# Altium PCB SM_ME0005V2.6_20161210.PcbDoc (part 2 of 2)
Units mm, origin at the board's own origin, x right, y up, seen from the top; angles counter-clockwise.
Board outline 58.04 x 88.14 mm, 2 copper layers (Top Layer, Bottom Layer); 87 components, 70 nets, 269 pads, 297 vias.
Unrouted connection lines stored in the file: 30.
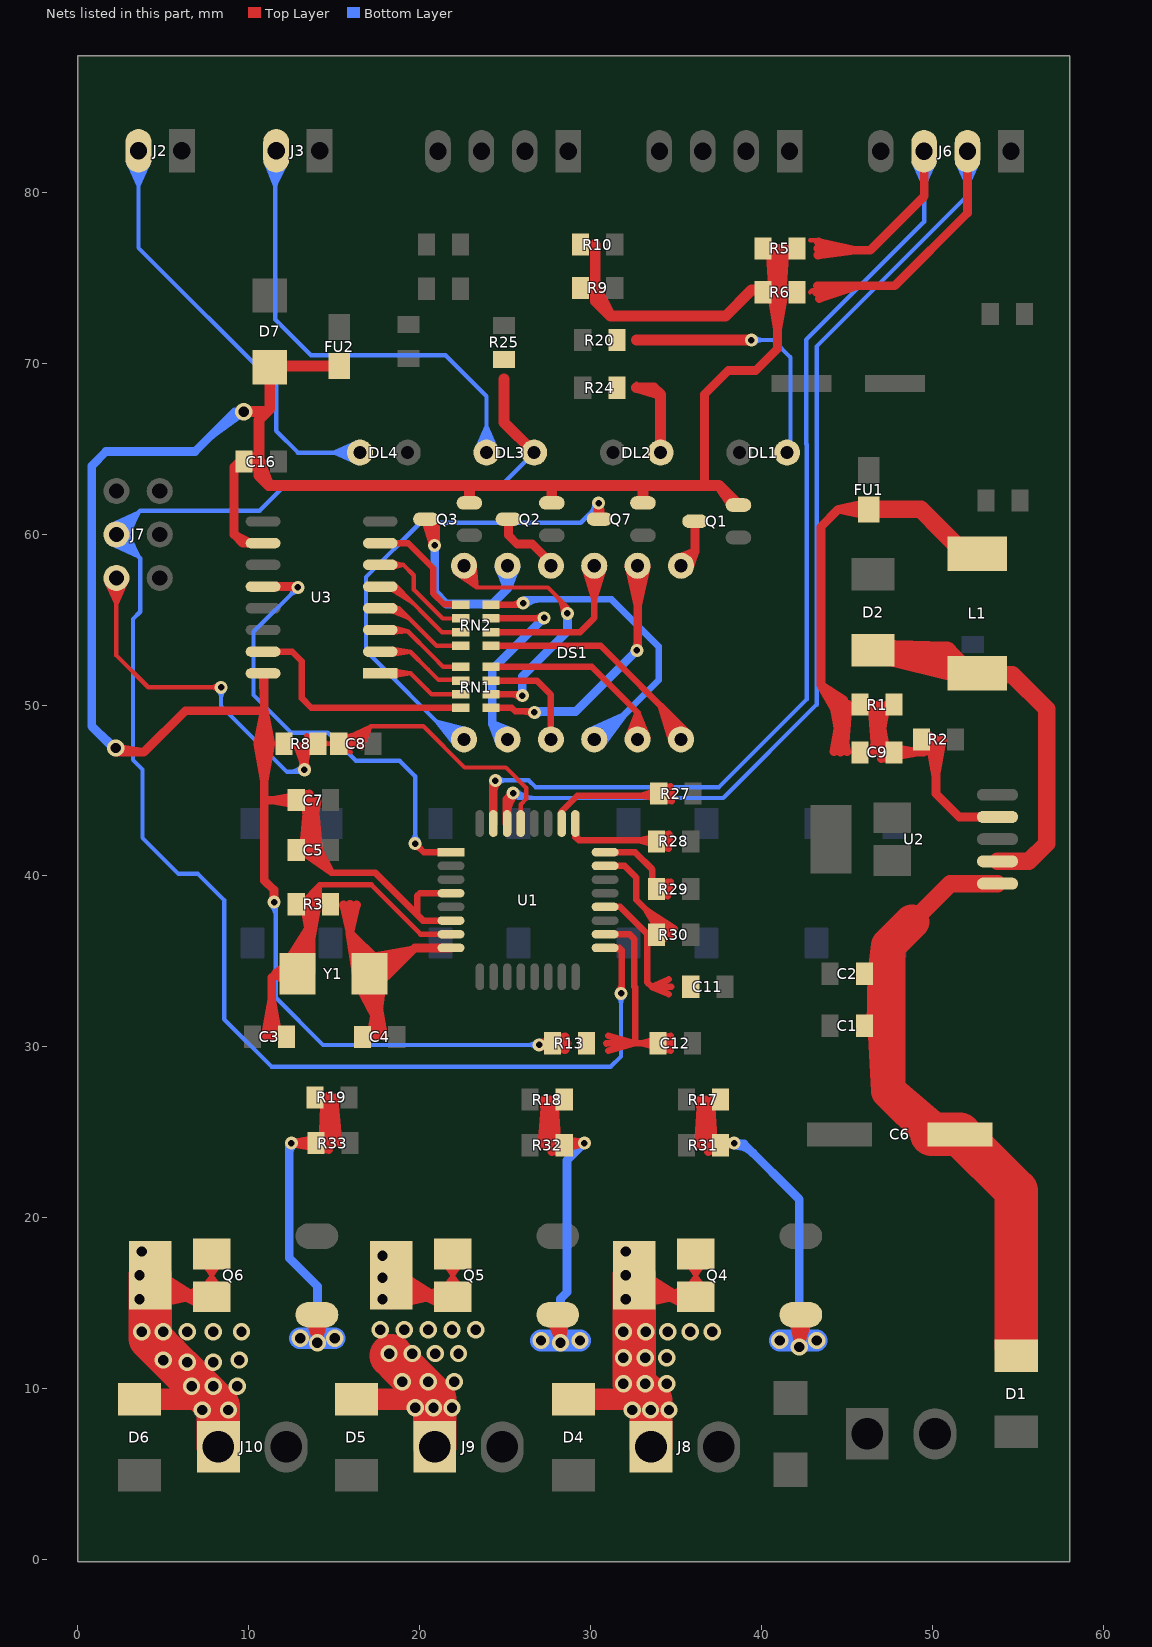
[diagram p2: the nets of this part, all layers, seen from the top]

## Via types
v1: diameter 1.016, hole 0.61, Top Layer to Bottom Layer, 247 vias
v2: diameter 0.762, hole 0.381, Top Layer to Bottom Layer, 50 vias

## Nets (pads, with @x,y where several pads share a name; then routed paths per layer and width w, separated by ;. In a path a pad name is that pad's centre, name@x,y a point inside that pad or via, vN(x,y) a via of type N, cw(c..) or ccw(c..) an arc to the next point about the centre after c; other vN are vias at no path point) (continued)
NetC1_1: C1.1 C2.1 C6.1 D1.K U2.1 | length 59.8
  Top Layer w1.016: 48.812,37.327 51.038,39.553 ; U2.1@52.955,39.553 51.038,39.553 ; U2.1@53.812,39.553 51.038,39.553
  Top Layer w2.032: 47.161,31.231 47.224,34.279 ; 48.812,37.327 47.415,35.93 ; C6.1@49.955,24.881 47.415,27.421 ; C6.1@50.406,24.881 47.415,27.421 ; 47.224,34.279 47.415,35.93 ; 47.224,34.279 47.415,35.93 ; 47.224,34.279 47.415,30.723 ; 47.415,27.421 47.415,30.723 ; 47.415,27.421 47.224,31.231 47.415,35.93 ; 47.415,30.723 47.415,35.93
  Top Layer w2.54: C6.1@49.955,24.881 C6.1@51.606,24.881 54.908,21.579 D1.K@54.908,12.435
NetC3_2: C3.2 R3.2 U1.7 Y1.2 | length 77.9
  Top Layer w0.254: 13.633,38.343 13.633,38.978
  Top Layer w0.305: 13.29,38.603 14.141,39.486 ; 13.536,38.419 14.141,39.486 ; 13.633,38.978 14.141,39.486 ; 13.696,38.343 14.141,39.486 ; 13.866,38.291 14.141,39.486 ; 14.172,38.26 14.141,39.486 ; 20.129,36.591 U1.7@21.294,36.591 ; U1.7@21.831,36.591 20.057,36.591 17.162,39.486 14.141,39.486
  Top Layer w0.508: 10.967,30.63 11.347,32.755 C3.2@11.727,30.63 ; 11.347,30.596 11.347,34.076 ; Y1.2@12.128,34.756 13.633,37.123 ; Y1.2@12.582,34.523 13.633,37.123 ; Y1.2@12.611,33.521 11.55,34.279 ; Y1.2@12.611,35.037 11.55,34.279 ; Y1.2@12.822,33.993 11.55,34.279 ; Y1.2@12.822,34.565 11.55,34.279 ; Y1.2@12.854,34.279 11.55,34.279 ; Y1.2@13.134,34.363 13.633,37.123 ; R3.2@13.253,38.309 13.633,36.184 14.013,38.309 ; 13.633,38.343 13.633,35.549 ; Y1.2@13.642,34.319 13.633,37.123 ; 11.55,34.279 Y1.2@12.363,34.279 ; Y1.2@12.361,35.054 13.633,35.549 ; Y1.2@12.361,35.054 13.633,35.549 ; Y1.2@12.361,35.054 13.633,35.549 ; Y1.2@12.363,34.279 13.633,35.549 ; Y1.2@12.363,34.279 12.608,34.524 13.633,35.549 ; Y1.2@12.636,34.617 13.633,35.549 ; Y1.2@12.636,34.617 13.633,35.549 ; Y1.2@12.636,34.617 13.633,35.549 ; Y1.2@12.854,34.429 13.633,35.549 ; Y1.2@12.854,34.429 13.633,37.123 ; Y1.2@12.854,34.429 13.633,35.549 ; Y1.2@12.854,34.429 13.633,35.549 ; Y1.2@13.106,34.29 13.633,35.549 ; Y1.2@13.106,34.29 13.633,35.549 ; Y1.2@13.106,34.29 13.633,35.549 ; Y1.2@13.611,34.185 13.633,35.549 ; Y1.2@13.611,34.185 13.633,35.549 ; Y1.2@13.611,34.185 13.633,35.549
NetC4_2: C4.2 R3.1 U1.8 Y1.1 | length 74.3
  Top Layer w0.508: 15.54,38.3 15.919,36.667 ; 15.919,38.343 15.919,36.667 ; Y1.1@16.296,34.186 15.919,36.667 ; 16.298,38.3 15.919,36.667 ; Y1.1@16.3,33.874 17.513,31.531 ; Y1.1@16.773,34.063 17.513,31.531 ; Y1.1@16.79,34.314 15.919,36.667 ; Y1.1@16.808,35.186 19.601,35.675 ; Y1.1@16.941,34.694 19.601,35.675 ; Y1.1@17.054,34.129 17.513,31.531 ; C4.2@17.133,30.617 17.513,32.743 17.893,30.617 ; Y1.1@17.193,34.177 19.601,35.675 ; Y1.1@17.303,34.574 15.919,36.667 ; Y1.1@17.34,34.164 17.513,31.531 ; Y1.1@17.5,33.77 19.601,35.675 ; 17.513,30.584 Y1.1@17.513,35.073 ; Y1.1@17.698,34.897 15.919,36.667 ; Y1.1@17.85,34.148 17.513,31.531 ; U1.8@21.294,35.791 19.717,35.791 ; U1.8@21.831,35.791 19.717,35.791 ; 15.919,36.667 Y1.1@17.513,35.073 ; 15.919,36.667 17.054,34.429 19.601,35.675 ; Y1.1@17.513,35.073 17.513,34.279 17.513,34.209 18.135,34.209 ; 18.135,34.209 19.717,35.791 ; 18.135,34.209 17.393,34.999 18.135,34.209 ; 18.135,34.209 17.298,33.521 18.135,34.209 ; 18.135,34.209 17.11,34.561 18.135,34.209 ; 18.135,34.209 17.074,33.992 18.135,34.209 ; 18.135,34.209 Y1.1@17.054,34.279 18.135,34.209
NetC9_1: C9.1 FU1.1 L1.2 R1.1 | length 55.5
  Top Layer w0.508: 44.241,47.267 44.621,49.392 45.001,47.267 ; 44.241,49.993 44.621,47.868 ; 44.251,49.801 43.478,51.17 ; 44.31,49.957 44.904,47.806 ; 44.557,50.027 43.478,51.17 ; 44.621,47.233 44.621,50.027 ; 44.684,50.027 44.904,47.806 ; 44.801,50.32 43.478,51.17 ; 45.001,49.993 44.621,47.868 ; 45.065,50.032 44.904,47.806 ; FU1.1@46.231,61.078 44.494,61.457 ; FU1.1@46.231,61.836 44.494,61.457 ; 43.478,51.17 43.478,60.441 44.494,61.457 ; 43.478,51.17 44.621,50.027 ; 44.494,61.457 FU1.1@46.272,61.457 44.494,61.457 ; 44.621,47.868 44.621,50.027
  Top Layer w1.016: FU1.1@46.272,61.457 49.32,61.457 ; L1.2@51.872,58.861 49.32,61.457 ; L1.2@52.622,58.861 51.916,58.861 49.32,61.457
NetC9_2: C9.2 R1.2 R2.2 U2.4 | length 51.8
  Top Layer w0.508: 46.463,50.032 46.624,47.806 ; 46.527,47.267 46.907,49.392 C9.2@47.287,47.267 ; 46.527,49.993 46.907,47.868 ; 46.843,50.027 46.624,47.806 ; 46.97,47.233 49.129,47.233 ; 47.004,46.853 49.129,47.233 ; 47.004,47.612 49.129,47.233 ; 47.218,49.957 46.624,47.806 ; R1.2@47.287,49.993 46.907,47.868 ; R2.2@49.829,47.961 50.209,45.836 ; 50.589,47.961 50.209,45.836 ; U2.4@52.955,43.453 51.576,43.453 ; U2.4@53.812,43.453 51.576,43.453 ; 46.907,47.868 46.907,50.027 46.907,47.233 49.447,47.233 ; 49.447,47.233 50.209,47.995 ; 49.447,47.233 50.374,47.69 49.447,47.233 ; 49.447,47.233 49.822,48.196 49.447,47.233 ; 49.447,47.233 50.145,47.995 49.447,47.233 ; 50.209,45.836 50.209,47.995 ; 50.209,47.995 50.209,44.82 51.576,43.453
NetC11_1: C11.1 U1.20 | length 11.4
  Top Layer w0.381: U1.20@30.848,38.191 31.737,38.191 ; 34.56,33.082 33.572,33.517 ; 34.56,33.952 33.572,33.517 ; 34.651,33.517 33.572,33.517 ; 34.715,33.517 33.572,33.517 ; 31.737,38.191 33.318,36.61 33.318,33.771 33.572,33.517 ; 31.737,38.191 31.385,38.191 31.737,38.191
NetC12_2: C12.2 R13.1 U1.18 | length 23
  Top Layer w0.254: 30.905,30.11 30.905,30.215
  Top Layer w0.381: U1.18@30.848,36.591 32.276,36.591 ; 30.905,30.215 32.556,30.215 ; 30.968,30.215 32.556,30.215 ; 31.031,29.775 32.556,30.215 ; 31.031,30.655 32.556,30.215 ; U1.18@31.385,36.591 32.276,36.591 ; 34.689,29.774 32.967,30.215 ; 34.689,30.656 32.967,30.215 ; 34.745,30.215 32.967,30.215 ; 34.808,30.215 32.556,30.215 ; 32.276,36.591 32.556,36.311 32.556,33.528 32.606,33.478 32.606,30.265 32.556,30.215
NetD2_K: D2.K L1.1 U2.2 | length 43.4
  Top Layer w1.016: L1.1@52.114,51.785 54.674,51.785 ; U2.2@53.812,40.853 55.64,40.853 ; U2.2@54.668,40.853 55.64,40.853 ; 54.674,51.785 56.686,49.773 56.686,41.899 55.64,40.853 ; 54.674,51.785 53.372,51.861 54.674,51.785
  Top Layer w1.27: D2.K@46.526,53.075 50.824,53.075 ; D2.K@46.86,53.075 L1.1@51.872,51.861 ; L1.1@51.491,51.953 46.843,53.202 50.824,53.075 ; L1.1@52.114,51.785 50.824,53.075 ; 50.824,53.075 L1.1@51.872,51.861 ; 50.824,53.075 L1.1@51.872,51.861
NetDL1_A: DL1.A R20.1 | length 19.1
  Top Layer w0.635: 32.683,71.363 v2(39.414,71.363) ; 32.746,71.363 35.286,71.363
  Bottom Layer w0.254: v2(39.414,71.363) 40.684,71.363 41.7,70.347 DL1.A@41.7,65.078 ; v2@39.594,71.183 cw(c40.027,70.75) 40.027,71.363 cw(c40.027,71.976) v2@39.594,71.543 ; DL1.A@41.7,65.078 41.397,64.775 41.447,64.825 DL1.A@41.7,65.078
NetDL2_A: DL2.A R24.1 | length 8.5
  Top Layer w0.254: 32.683,68.569 32.683,68.823
  Top Layer w0.635: 32.683,68.569 33.699,68.569 ; DL2.A@34.097,64.775 34.097,68.171 ; 32.746,68.569 34.097,68.171 ; 32.746,68.569 33.699,68.569 ; 32.746,68.569 33.699,68.569 ; 33.699,68.569 34.097,68.171
NetDS1_a: DS1.a RN1.8 | length 21.8
  Top Layer w0.381: RN1.8@24.174,49.837 25.38,49.837 ; RN1.8@24.432,49.837 25.38,49.837 ; 26.1,49.633 cw(c26.1,48.956) v2@26.579,49.435 ; v2(26.714,49.57) 26.65,49.633 25.583,49.633 25.38,49.837
  Top Layer w0.508: DS1.a@32.248,58.099 32.753,55.869 DS1.a@33.258,58.099 ; v2@32.619,53.292 ccw(c32.294,53.616) 32.753,53.616 ; v2@32.753,53.202 DS1.a@32.753,58.155
  Bottom Layer w0.508: v2@26.765,49.621 29.127,49.621 v2(32.708,53.202) ; v2@26.804,49.48 cw(c27.143,49.141) 27.143,49.621
NetDS1_b: DS1.b RN1.6 | length 27.6
  Top Layer w0.254: DS1.b@22.127,57.724 23.336,56.885 ; DS1.b@22.292,57.922 23.336,56.885 ; DS1.b@22.777,57.971 DS1.b@22.593,58.155 ; DS1.b@22.944,58.303 23.336,56.885 ; DS1.b@23.197,58.35 23.336,56.885 ; 27.941,56.445 cw(c26.857,55.361) v2@28.39,55.361 ; 28.375,56.011 cw(c27.725,55.361) v2(28.644,55.361) 28.644,55.742 27.501,56.885 23.336,56.885 ; DS1.b@22.593,58.155 22.593,57.628 23.336,56.885 ; DS1.b@22.593,58.155 23.336,56.885
  Top Layer w0.381: RN1.6@24.174,50.637 25.926,50.637 v2(26.003,50.56) ; RN1.6@24.432,50.637 v2@25.825,50.637 ; 25.358,50.637 cw(c25.358,49.916) 25.868,50.426 ccw(c25.358,49.916) 25.358,50.637
  Bottom Layer w0.508: v2(26.003,50.56) 26.003,51.678 28.644,54.32 v2(28.644,55.361)
NetDS1_c: DS1.c RN1.4 | length 7.9
  Top Layer w0.381: RN1.4@24.174,51.437 26.854,51.437 27.673,50.617 DS1.c@27.673,47.995 ; RN1.4@24.432,51.437 25.825,51.437
NetDS1_com1: DS1.com1 Q1.3 | length 5.3
  Top Layer w0.508: DS1.com1@35.021,58.584 36.112,58.974 ; DS1.com1@35.293,58.155 36.112,58.974 ; DS1.com1@35.722,57.883 36.112,58.974 ; Q1.3@36.112,60.756 36.112,58.974
NetDS1_com2: DS1.com2 Q2.3 | length 4.3
  Top Layer w0.508: Q2.3@25.19,60.883 25.19,59.933 25.698,59.425 26.587,59.425 27.673,58.339 DS1.com2@27.673,58.155
NetDS1_com3: DS1.com3 Q3.3 | length 18.3
  Top Layer w0.508: v2(20.872,59.349) 20.872,60.149
  Top Layer w0.635: 20.872,60.375 v2(20.872,59.349) Q3.3@20.364,60.883 20.872,60.375 ; 20.872,60.375 20.714,60.883 20.872,60.375
  Bottom Layer w0.508: v2(20.872,59.349) 20.872,56.606 21.558,55.92 24.25,55.92 25.133,56.803 ; DS1.com3@24.634,58.06 25.133,56.803 ; DS1.com3@25.632,58.06 25.133,56.803 ; 25.133,56.803 DS1.com3@25.133,58.155 25.133,56.803
NetDS1_com4: DS1.com4 Q7.3 | length 39.8
  Top Layer w0.254: v2@30.473,61.711 v2@30.524,61.66
  Top Layer w0.635: Q7.3@30.473,60.934 30.473,61.711 Q7.3@30.524,60.883
  Bottom Layer w0.254: DS1.com4@22.162,47.529 20.993,49.043 ; DS1.com4@22.354,47.699 20.993,49.043 ; DS1.com4@22.769,48.333 20.993,49.043 ; DS1.com4@22.848,48.577 20.993,49.043 ; 29.975,61.224 ccw(c29.387,61.813) v2@30.219,61.813 ; 30.195,61.443 cw(c30.473,61.165) v2@30.473,61.559 ; v2@30.473,61.711 30.462,61.711 29.421,60.67 20.034,60.67 16.859,57.495 16.859,53.177 22.04,47.995 DS1.com4@22.593,47.995 20.993,49.043
  other v2: 30.473,61.813
NetDS1_d: DS1.d RN1.2 | length 15.8
  Top Layer w0.381: RN1.2@24.174,52.237 30.067,52.237 32.753,49.551 ; RN1.2@24.432,52.237 25.825,52.237 ; DS1.d@32.191,48.1 32.753,49.551 ; DS1.d@32.753,47.995 32.753,49.551 ; DS1.d@33.315,48.1 32.753,49.551
NetDS1_dp: DS1.dp RN2.2 | length 28.7
  Top Layer w0.381: RN2.2@24.174,55.869 25.952,55.869 v2(26.054,55.971) ; RN2.2@24.432,55.869 v2@25.825,55.869 ; 25.348,55.869 ccw(c25.348,56.676) 25.919,56.105 cw(c25.348,56.676) 25.348,55.869
  Bottom Layer w0.254: DS1.dp@30.213,47.995 DS1.dp@30.213,48.306
  Bottom Layer w0.381: v2@26.104,56.123 26.168,56.186 31.222,56.186 33.978,53.431 33.978,51.449 30.835,48.306 30.524,48.306 DS1.dp@30.213,47.995 31.935,49.406 ; v2@26.188,55.836 cw(c27.035,54.989) 27.035,56.186 ; DS1.dp@29.911,48.48 31.935,49.406 ; DS1.dp@30.629,47.603 31.935,49.406
NetDS1_e: DS1.e RN2.8 | length 26
  Top Layer w0.381: RN2.8@24.174,53.469 30.587,53.469 35.293,48.763 ; RN2.8@24.432,53.469 25.825,53.469 ; DS1.e@34.772,47.76 34.087,49.969 ; DS1.e@35.74,48.351 34.087,49.969 ; 34.087,49.969 DS1.e@35.293,47.995 ; DS1.e@35.293,47.995 35.293,48.763 ; DS1.e@35.293,47.995 35.293,48.763 ; 35.293,48.763 34.763,48.208 35.293,48.763 ; 35.293,48.763 35.823,48.208 35.293,48.763
NetDS1_f: DS1.f RN2.6 | length 14.6
  Top Layer w0.381: RN2.6@24.174,54.269 29.381,54.269 30.213,55.101 DS1.f@30.213,58.155 ; RN2.6@24.432,54.269 25.825,54.269 ; DS1.f@29.648,58.069 30.213,56.25 DS1.f@30.778,58.069
NetDS1_g: DS1.g RN2.4 | length 15.9
  Top Layer w0.381: RN2.4@24.174,55.069 v2@27.006,55.069 ; RN2.4@24.432,55.069 25.825,55.069 ; 26.721,55.069 ccw(c26.721,55.659) v2@27.138,55.242
  Bottom Layer w0.508: DS1.g@24.708,47.716 24.25,48.878 ; DS1.g@25.133,47.995 24.25,48.878 ; DS1.g@25.412,48.42 24.25,48.878 ; v2(27.273,55.107) 24.25,52.084 24.25,48.878
NetQ4_1: Q4.1 R17.2 R31.2 | length 58.1
  Top Layer w0.508: 36.303,24.239 36.452,26.408 ; 36.367,24.28 36.747,26.405 ; 36.367,26.879 36.747,24.754 R17.2@37.127,26.879 ; 36.437,24.32 37.042,26.408 ; 36.683,24.246 36.452,26.408 ; 36.747,24.246 36.747,26.405 ; 36.747,26.913 36.747,24.373 v2(38.398,24.373) ; 36.826,24.627 v2(38.398,24.373) ; 36.886,23.873 v2(38.398,24.373) ; 37.057,24.32 36.452,26.408 ; R31.2@37.127,24.28 36.747,26.405 ; R31.2@37.191,24.239 37.042,26.408 ; Q4.1@41.811,14.286 v1(42.208,12.435) ; Q4.1@42.793,14.236 v1(42.208,12.435) ; 37.042,26.408 36.81,24.246 v2(38.398,24.373) ; v1(42.208,12.435) 42.208,14.325 42.235,14.352 42.279,14.352 Q4.1@42.305,14.326 v1(42.208,12.435)
  Bottom Layer w0.508: v2@38.398,24.246 cw(c38.398,22.682) 39.504,23.788 ; v2(38.398,24.373) 38.455,24.316 38.976,24.316 42.208,21.084 42.208,12.816 v1(42.208,12.435) ; v2@38.488,24.463 ccw(c38.842,24.817) 38.842,24.316
  Bottom Layer w1.27: v1(41.065,12.816) 42.208,12.816 v1(43.224,12.816)
NetQ5_1: Q5.1 R18.2 R32.2 | length 65.6
  Top Layer w0.254: Q5.1@28.079,14.326 Q5.1@28.081,14.326
  Top Layer w0.508: 27.159,24.239 27.308,26.408 ; 27.223,24.28 27.603,26.405 ; 27.223,26.879 27.603,24.754 R18.2@27.983,26.879 ; 27.293,24.32 27.898,26.408 ; 27.539,24.246 27.308,26.408 ; Q5.1@27.6,14.205 v1(28.238,12.689) ; 27.603,24.246 27.603,26.405 ; 27.603,26.913 27.603,24.373 ; 27.913,24.32 27.308,26.408 ; R32.2@27.983,24.28 27.603,26.405 ; R32.2@28.047,24.239 27.898,26.408 ; Q5.1@28.576,14.298 v1(28.238,12.689) ; 27.603,24.373 v2(29.635,24.373) ; 27.603,24.373 v2(29.635,24.373) ; 27.666,24.246 27.898,26.408 ; 27.666,24.246 v2(29.635,24.373) ; 27.666,24.246 v2(29.635,24.373) ; v1(28.238,12.689) 28.238,14.169 Q5.1@28.081,14.326 v1(28.238,12.689) ; v2(29.635,24.373) 27.679,24.627 v2(29.635,24.373) ; v2(29.635,24.373) 27.728,23.87 v2(29.635,24.373)
  Bottom Layer w0.508: v1@28.238,12.816 28.238,15.261 28.619,15.642 28.619,23.357 v2(29.635,24.373)
  Bottom Layer w1.27: v1@28.238,12.816 v1(27.095,12.816) v1@28.238,12.816 ; v1@28.238,12.816 v1(29.381,12.816) v1@28.238,12.816
NetQ6_1: Q6.1 R19.2 R33.2 | length 67.4
  Top Layer w0.254: 14.719,24.43 14.776,24.373
  Top Layer w0.508: v2(12.49,24.373) 14.649,24.373 ; Q6.1@13.495,14.242 v1(14.014,12.689) ; R33.2@14.332,24.356 14.427,26.515 ; R19.2@14.339,27.006 14.719,24.881 ; 14.464,24.437 15.019,26.564 ; Q6.1@14.476,14.26 v1(14.014,12.689) ; 14.679,23.993 v2@12.553,24.373 ; 14.679,24.752 v2@12.553,24.373 ; 14.719,24.43 14.719,27.167 ; 14.719,27.04 14.719,24.881 ; 14.839,24.373 15.019,26.564 ; 15.084,24.456 14.427,26.515 ; 15.099,27.006 14.719,24.881 ; 15.22,24.375 15.019,26.564 ; v2@12.553,24.373 14.712,24.373 14.427,26.515 ; v1(14.014,12.689) 14.014,14.296 Q6.1@13.984,14.326 v1(14.014,12.689) ; 14.719,26.534 14.396,24.397 14.719,26.539 ; 14.719,26.534 15.154,24.417 14.719,26.539 ; 14.719,26.534 14.776,24.373 14.719,26.539
  Bottom Layer w0.508: 12.363,23.76 cw(c13.103,23.76) v2@12.58,24.283 ; v2@12.363,24.246 12.363,17.642 14.014,15.991 14.014,12.943 v1(14.014,12.689)
  Bottom Layer w1.27: v1@14.014,12.943 v1(12.998,12.943) v1@14.014,12.943 ; v1@14.014,12.943 v1(15.03,12.943) v1@14.014,12.943
NetR27_2: R27.2 U1.26 | length 13.1
  Top Layer w0.381: U1.26@28.309,43.069 28.309,43.788 29.213,44.693 34.715,44.693 34.842,44.82 ; 34.692,45.256 32.99,44.693 ; 34.755,44.376 32.99,44.693 ; 34.778,44.82 32.99,44.693
NetR28_2: R28.2 U1.25 | length 26
  Top Layer w0.254: U1.25@29.109,43.069 29.109,42.28 ; R28.2@34.334,42.026 29.363,42.026 ; 34.559,41.526 33.254,42.026 ; 34.559,42.526 33.254,42.026 ; 34.628,41.773 33.254,42.026 ; 34.628,42.279 33.254,42.026 ; 34.651,42.026 33.254,42.026 ; 29.109,42.28 29.363,42.026 ; 29.109,42.28 U1.25@29.109,42.531 ; 29.109,42.28 U1.25@29.109,42.531 ; U1.25@29.109,42.531 29.363,42.026
  Top Layer w0.381: 34.581,41.587 32.871,42.085 ; 34.611,42.469 32.871,42.085 ; 34.651,42.026 32.871,42.085 ; 34.715,42.026 34.656,42.085 29.303,42.085 ; 29.303,42.085 29.109,42.28 29.109,42.531 29.303,42.085
NetR29_2: R29.2 U1.24 | length 14.1
  Top Layer w0.381: U1.24@30.848,41.391 32.601,41.391 ; U1.24@31.385,41.391 32.601,41.391 ; 34.443,38.84 R29.2@33.617,39.531 ; 34.684,39.675 R29.2@33.617,39.531 ; 34.715,39.232 R29.2@33.915,39.232 ; 32.601,41.391 33.617,40.375 R29.2@33.617,39.531 ; R29.2@33.617,39.531 R29.2@33.915,39.232 ; R29.2@33.617,39.531 34.651,39.232 ; R29.2@33.915,39.232 34.517,38.808 R29.2@33.915,39.232 ; R29.2@33.915,39.232 34.517,39.656 R29.2@33.915,39.232 ; R29.2@33.915,39.232 34.651,39.232 ; R29.2@33.915,39.232 34.651,39.232
NetR30_2: R30.2@33.858,36.565 U1.23 | length 12.9
  Top Layer w0.381: U1.23@30.848,40.591 31.991,40.591 ; U1.23@31.385,40.591 31.991,40.591 ; R30.2@34.298,36.295 33.272,38.008 ; 34.651,36.565 33.272,38.008 ; 34.715,36.565 32.677,38.603 32.677,39.905 31.991,40.591 ; 34.937,36.906 33.272,38.008
NetRN1_1: RN1.1 U3.3 | length 9.1
  Top Layer w0.254: U3.3@17.691,54.396 17.767,54.32 19.297,54.32 ; U3.3@18.402,54.396 19.297,54.32 ; U3.3@18.405,54.218 19.297,54.32 ; U3.3@18.435,54.571 19.297,54.32 ; RN1.1@22.138,52.237 21.38,52.237 ; RN1.1@22.396,52.237 21.38,52.237 ; 19.297,54.32 20.745,52.872 21.38,52.237
NetRN1_3: RN1.3 U3.2 | length 9.6
  Top Layer w0.254: U3.2@17.691,53.126 19.45,53.126 ; U3.2@18.402,53.126 19.45,53.126 ; U3.2@18.417,52.949 19.45,53.126 ; U3.2@18.417,53.303 19.45,53.126 ; 21.125,51.475 RN1.3@22.138,51.437 ; RN1.3@22.396,51.437 22.358,51.475 21.101,51.475 20.516,52.059 19.45,53.126
NetRN1_5: RN1.5 U3.1 | length 9.4
  Top Layer w0.254: U3.1@17.691,51.856 19.475,51.856 20.44,50.891 20.694,50.637 RN1.5@22.396,50.637 ; U3.1@18.402,51.856 19.469,51.856 ; U3.1@18.417,51.679 19.469,51.856 ; U3.1@18.417,52.033 19.469,51.856 ; 21.126,50.637 RN1.5@22.138,50.637
NetRN1_7: RN1.7 U3.15 | length 16.6
  Top Layer w0.254: 13.658,49.849 13.671,49.837
  Top Layer w0.381: U3.15@10.833,53.126 12.541,53.126 ; U3.15@11.544,53.126 12.541,53.126 ; 13.658,49.849 13.1,50.408 13.1,52.567 12.541,53.126 ; 13.671,49.837 RN1.7@22.396,49.837 ; 20.745,49.837 RN1.7@22.138,49.837
NetRN2_1: RN2.1 U3.7 | length 9
  Top Layer w0.381: U3.7@17.691,59.476 19.323,59.476 ; U3.7@18.402,59.476 19.323,59.476 ; 20.791,56.966 20.791,57.241 ; RN2.1@22.138,55.869 21.431,55.894 ; RN2.1@22.396,55.869 22.371,55.894 21.431,55.894 ; 19.323,59.476 20.791,58.007 20.791,57.241 ; 20.791,57.241 20.791,56.534 21.431,55.894
NetRN2_3: RN2.3 U3.6 | length 9.2
  Top Layer w0.254: U3.6@17.691,58.206 19.043,58.206 ; U3.6@18.402,58.206 19.043,58.206 ; U3.6@18.427,58.03 19.043,58.206 ; U3.6@18.427,58.382 19.043,58.206 ; RN2.3@22.138,55.069 21.342,55.069 ; RN2.3@22.396,55.069 21.342,55.069 ; 19.043,58.206 19.653,57.596 19.653,56.758 21.342,55.069
NetRN2_5: RN2.5 U3.5 | length 11.6
  Top Layer w0.254: U3.5@17.691,56.936 18.637,56.936 21.304,54.269 ; U3.5@18.299,56.791 19.61,55.963 ; U3.5@18.402,56.936 19.61,55.963 ; U3.5@18.521,57.068 19.61,55.963 ; RN2.5@22.138,54.269 21.304,54.269 ; RN2.5@22.675,54.269 21.304,54.269
NetRN2_7: RN2.7 U3.4 | length 12.4
  Top Layer w0.254: U3.4@17.691,55.666 18.789,55.666 ; U3.4@18.322,55.507 19.386,55.069 ; U3.4@18.506,55.81 19.386,55.069 ; 21.126,53.469 RN2.7@22.138,53.469 ; RN2.7@22.396,53.469 20.986,53.469 18.789,55.666 ; U3.4@18.402,55.666 18.789,55.666 ; U3.4@18.402,55.666 19.386,55.069 ; U3.4@18.402,55.666 18.789,55.666 ; 18.789,55.666 18.443,55.839 18.789,55.666 ; 18.789,55.666 18.443,55.493 18.789,55.666
OUT1: D4.A J8.1 Q4.2 | length 114.1
  Top Layer w0.254: D4.A@29,9.387 D4.A@29.857,9.387 ; Q4.2@32.513,15.262 Q4.2@35.383,15.376 ; Q4.2@32.515,15.517 Q4.2@35.383,15.376 ; Q4.2@32.535,15.007 Q4.2@35.383,15.376 ; Q4.2@32.555,15.876 Q4.2@35.383,15.376 ; Q4.2@32.555,16.626 33.805,15.376 Q4.2@36.155,15.376 36.155,16.601 ; Q4.2@32.579,14.753 Q4.2@35.383,15.376 ; Q4.2@32.64,16.227 Q4.2@35.383,15.376 ; J8.1@32.651,6.593 J8.1@33.534,6.593 ; Q4.2@32.726,16.467 Q4.2@35.383,15.376 ; Q4.2@32.834,16.699 Q4.2@35.383,15.376 ; Q4.2@32.963,16.922 Q4.2@35.383,15.376 ; Q4.2@35.418,17.642 36.155,16.601 ; Q4.2@35.421,15.62 36.155,16.601 ; Q4.2@35.648,15.486 36.155,16.601 ; Q4.2@35.647,17.77 36.155,16.601 ; Q4.2@35.775,14.624 34.293,15.376 ; Q4.2@35.775,16.128 34.293,15.376 ; Q4.2@35.874,14.863 34.293,15.376 ; Q4.2@35.874,15.889 34.293,15.376 ; Q4.2@35.892,15.405 36.155,16.601 ; Q4.2@35.891,17.848 36.155,16.601 ; Q4.2@35.934,15.112 34.293,15.376 ; Q4.2@35.934,15.64 34.293,15.376 ; Q4.2@35.955,15.376 34.293,15.376 ; Q4.2@36.155,17.876 36.155,16.601 ; Q4.2@36.418,15.405 36.155,16.601 ; Q4.2@36.419,17.848 36.155,16.601 ; Q4.2@36.662,15.486 36.155,16.601 ; Q4.2@36.663,17.77 36.155,16.601 ; Q4.2@36.888,15.62 36.155,16.601 ; Q4.2@36.892,17.642 36.155,16.601
  Top Layer w0.635: 33.443,9.387 33.534,9.296
  Top Layer w1.27: 31.921,9.387 D4.A@29,9.387 33.443,9.387 ; 31.921,9.387 32.429,9.387 33.191,9.387 33.443,9.387 ; 31.921,9.387 29.317,9.387 33.443,9.387
  Top Layer w2.54: 32.555,10.276 32.555,11.8 32.555,13.324 ; 32.555,10.275 33.443,9.387 33.253,9.576 32.872,9.957 32.555,10.275 ; 32.555,10.275 Q4.2@32.555,16.626 32.555,15.229 32.555,13.324 ; 32.555,10.275 32.555,15.876 32.555,13.324 ; J8.1@33.534,6.843 33.534,9.296 ; J8.1@33.534,6.843 33.534,9.296 ; J8.1@33.534,6.843 v1@33.534,8.752 ; J8.1@33.534,6.843 v1@33.534,8.752 ; v1@33.534,8.752 33.534,9.296 ; v1@33.534,8.752 J8.1@33.534,6.593 33.534,9.296
  other v1: 32.429,8.752 33.508,8.752 34.588,8.752 31.921,10.276 33.191,10.276 34.461,10.276 31.921,11.8 33.191,11.8 34.461,11.8 31.921,13.324 33.223,13.324 34.524,13.324 35.826,13.324 37.128,13.324 32.048,15.229 32.048,16.626 32.048,18.023
OUT2: D5.A J9.1 Q5.2 | length 99.1
  Top Layer w0.254: D5.A@16.3,9.387 D5.A@17.183,9.387 ; Q5.2@18.289,15.262 Q5.2@21.159,15.376 ; Q5.2@18.291,15.517 Q5.2@21.159,15.376 ; Q5.2@18.311,15.007 Q5.2@21.159,15.376 ; 18.331,11.418 v1@18.331,11.928 ; Q5.2@18.331,15.876 Q5.2@21.159,15.376 ; Q5.2@18.331,16.626 19.581,15.376 Q5.2@21.931,15.376 21.931,16.601 ; Q5.2@18.355,14.753 Q5.2@21.159,15.376 ; Q5.2@18.416,16.227 Q5.2@21.159,15.376 ; Q5.2@18.502,16.467 Q5.2@21.159,15.376 ; Q5.2@18.61,16.699 Q5.2@21.159,15.376 ; Q5.2@18.739,16.922 Q5.2@21.159,15.376 ; J9.1@19.977,6.593 J9.1@20.877,6.593 ; Q5.2@21.194,17.642 21.931,16.601 ; Q5.2@21.197,15.62 21.931,16.601 ; Q5.2@21.424,15.486 21.931,16.601 ; Q5.2@21.423,17.77 21.931,16.601 ; Q5.2@21.551,14.624 20.069,15.376 ; Q5.2@21.551,16.128 20.069,15.376 ; Q5.2@21.65,14.863 20.069,15.376 ; Q5.2@21.65,15.889 20.069,15.376 ; Q5.2@21.668,15.405 21.931,16.601 ; Q5.2@21.667,17.848 21.931,16.601 ; Q5.2@21.71,15.112 20.069,15.376 ; Q5.2@21.71,15.64 20.069,15.376 ; Q5.2@21.731,15.376 20.069,15.376 ; Q5.2@21.931,17.876 21.931,16.601 ; Q5.2@22.194,15.405 21.931,16.601 ; Q5.2@22.195,17.848 21.931,16.601 ; Q5.2@22.438,15.486 21.931,16.601 ; Q5.2@22.439,17.77 21.931,16.601 ; Q5.2@22.664,15.62 21.931,16.601 ; Q5.2@22.668,17.642 21.931,16.601
  Top Layer w1.27: 20.877,9.382 20.872,9.387 ; 18.967,9.387 19.729,9.387 20.491,9.387 20.808,9.387 20.872,9.387 ; 18.967,9.387 D5.A@16.3,9.387 20.872,9.387 ; 18.967,9.387 16.617,9.387 20.872,9.387
  Top Layer w2.54: J9.1@20.877,6.843 20.877,9.382 ; J9.1@20.877,6.843 20.877,9.382 ; J9.1@20.877,6.843 v1@20.877,8.879 ; J9.1@20.877,6.843 v1@20.877,8.879 ; v1@20.877,8.879 20.877,9.382 ; v1@20.877,8.879 J9.1@20.877,6.593 20.877,9.382 ; v1@18.331,11.928 20.872,9.387 20.554,9.704 20.173,10.085 19.411,10.847 18.882,11.377 v1@18.331,11.928
  other v1: 19.729,8.879 20.808,8.879 21.888,8.879 18.967,10.403 20.491,10.403 22.015,10.403 18.205,12.054 19.56,12.054 20.914,12.054 22.269,12.054 17.697,13.451 19.094,13.451 20.491,13.451 21.888,13.451 23.285,13.451 17.824,15.229 17.824,16.499 17.824,17.769
OUT3: D6.A J10.1 Q6.2 | length 112.8
  Top Layer w0.254: D6.A@3.6,9.387 D6.A@4.508,9.387 ; Q6.2@4.192,15.262 Q6.2@7.062,15.376 ; Q6.2@4.194,15.517 Q6.2@7.062,15.376 ; Q6.2@4.214,15.007 Q6.2@7.062,15.376 ; Q6.2@4.234,15.876 Q6.2@7.062,15.376 ; Q6.2@4.234,16.626 5.484,15.376 Q6.2@7.834,15.376 7.834,16.601 ; Q6.2@4.258,14.753 Q6.2@7.062,15.376 ; Q6.2@4.319,16.227 Q6.2@7.062,15.376 ; Q6.2@4.405,16.467 Q6.2@7.062,15.376 ; Q6.2@4.513,16.699 Q6.2@7.062,15.376 ; Q6.2@4.642,16.922 Q6.2@7.062,15.376 ; Q6.2@7.097,17.642 7.834,16.601 ; Q6.2@7.1,15.62 7.834,16.601 ; J10.1@7.302,6.593 J10.1@8.219,6.593 ; Q6.2@7.327,15.486 7.834,16.601 ; Q6.2@7.326,17.77 7.834,16.601 ; Q6.2@7.454,14.624 5.972,15.376 ; Q6.2@7.454,16.128 5.972,15.376 ; Q6.2@7.553,14.863 5.972,15.376 ; Q6.2@7.553,15.889 5.972,15.376 ; Q6.2@7.571,15.405 7.834,16.601 ; Q6.2@7.57,17.848 7.834,16.601 ; Q6.2@7.613,15.112 5.972,15.376 ; Q6.2@7.613,15.64 5.972,15.376 ; Q6.2@7.634,15.376 5.972,15.376 ; Q6.2@7.834,17.876 7.834,16.601 ; Q6.2@8.097,15.405 7.834,16.601 ; Q6.2@8.098,17.848 7.834,16.601 ; Q6.2@8.341,15.486 7.834,16.601 ; Q6.2@8.342,17.77 7.834,16.601 ; Q6.2@8.567,15.62 7.834,16.601 ; Q6.2@8.571,17.642 7.834,16.601
  Top Layer w0.635: 7.791,9.387 8.219,8.959 7.854,9.323 7.791,9.387
  Top Layer w1.27: 6.648,9.387 7.283,9.387 7.791,9.387 ; 6.648,9.387 D6.A@3.6,9.387 7.791,9.387 ; 6.648,9.387 3.917,9.387 7.791,9.387
  Top Layer w2.54: 4.234,12.944 Q6.2@4.234,16.626 4.234,15.229 v1@4.234,13.324 ; 4.234,12.944 7.791,9.387 7.473,9.704 6.838,10.339 6.775,10.403 6.013,11.165 5.251,11.927 4.425,12.752 4.234,12.944 ; 4.234,12.944 v1@4.234,13.324 ; 4.234,12.944 4.234,15.876 v1@4.234,13.324 ; J10.1@8.219,6.843 8.219,8.959 ; J10.1@8.219,6.843 8.219,8.752 ; J10.1@8.219,6.843 8.219,8.959 ; J10.1@8.219,6.843 8.219,8.752 ; 8.219,8.752 J10.1@8.219,6.593 8.219,8.959 ; 8.219,8.752 8.219,8.959
  other v1: 7.283,8.752 8.807,8.752 6.648,10.149 7.918,10.149 9.315,10.149 6.394,11.546 7.918,11.546 4.997,11.673 9.442,11.673 3.727,13.324 4.997,13.324 6.394,13.324 7.918,13.324 9.569,13.324 3.6,15.229 3.6,16.626 3.727,18.023
RESET: C8.2 J7.5 R8.2 U1.29 | length 80.1
  Top Layer w0.254: J7.5@1.627,57.311 2.248,55.92 ; J7.5@1.87,57.396 2.248,55.92 ; J7.5@2.626,57.396 2.248,55.92 ; J7.5@2.869,57.311 2.248,55.92 ; v2@8.196,50.863 ccw(c7.762,50.43) 7.762,51.043 ccw(c7.762,51.656) v2@8.196,51.223 ; v2(8.375,51.043) 4.108,51.043 2.248,52.903 J7.5@2.248,57.444 2.248,55.92 ; 12.695,47.649 v2@13.195,46.344 ; 12.942,47.718 v2@13.195,46.344 ; 13.019,46.804 ccw(c13.616,47.033) v2@13.355,46.449 ; v2@13.02,46.32 ccw(c12.484,46.56) 13.032,46.769 ; v2@13.043,46.361 ccw(c12.631,46.645) 13.123,46.736 ; v2@13.072,46.397 ccw(c12.776,46.693) 13.195,46.693 ; 13.094,46.893 ccw(c13.808,47.024) v2@13.396,46.426 ; v2@13.108,46.426 ccw(c12.913,46.709) 13.251,46.647 ; v2@13.148,46.449 ccw(c13.036,46.701) 13.294,46.603 ; 13.195,46.968 ccw(c14.003,46.968) v2@13.432,46.397 ; v2(13.252,46.217) 13.195,46.274 13.195,47.741 16.116,47.741 17.132,48.757 ; 13.258,47.741 14.655,47.741 ; 13.282,47.488 14.655,47.741 ; 13.282,47.994 14.655,47.741 ; 13.32,47.022 ccw(c14.188,46.862) v2@13.461,46.361 ; 13.351,47.241 14.655,47.741 ; 13.351,48.241 14.655,47.741 ; 13.448,47.718 v2@13.195,46.344 ; 13.464,47.047 ccw(c14.351,46.708) v2@13.484,46.32 ; R8.2@13.695,47.649 v2@13.195,46.344 ; 15.878,48.15 17.132,48.757 ; 15.96,47.241 14.655,47.741 ; 15.96,48.241 14.655,47.741 ; 16.011,47.931 17.132,48.757 ; 16.029,47.488 14.655,47.741 ; 16.029,47.994 14.655,47.741 ; 16.052,47.741 14.655,47.741 ; 16.179,47.741 17.132,48.757 ; 16.38,47.585 17.132,48.757 ; 16.607,47.467 17.132,48.757 ; U1.29@25.909,43.069 25.909,44.188 ; U1.29@25.909,43.606 25.909,44.188 ; 17.132,48.757 20.215,48.757 22.628,46.344 25.042,46.344 26.225,45.161 26.225,44.504 25.909,44.188
  Bottom Layer w0.254: v2@8.196,50.863 cw(c7.762,50.43) 8.375,50.43 cw(c8.988,50.43) v2@8.555,50.863 ; v2(8.375,51.043) 8.375,49.951 12.236,46.09 13.125,46.09 v2(13.252,46.217) ; 12.332,46.09 ccw(c12.332,47.137) v2@13.072,46.397
RX: J6.2 R6.1 U1.30 | length 93.8
  Top Layer w0.254: 42.843,74.157 42.97,74.284 43.224,74.284
  Top Layer w0.508: U1.30@25.109,43.069 25.109,44.491 ; U1.30@25.109,43.606 25.109,44.491 ; v2(25.463,44.845) 25.109,44.491 ; 43.224,74.157 43.605,74.538 47.796,74.538 52.057,78.799 J6.2@52.057,82.412 ; 43.256,74.537 45.582,74.538 ; 43.287,74.157 45.582,74.538 ; 43.38,73.788 45.582,74.538 ; U1.30@25.109,43.683 cw(c26.626,43.683) 25.553,44.756 ccw(c26.626,43.683) U1.30@25.109,43.683 ; 25.109,44.344 cw(c25.483,44.344) 25.468,44.718 ccw(c25.483,44.344) 25.109,44.344
  Bottom Layer w0.254: v2@25.643,45.025 ccw(c26.751,46.133) 26.751,44.566 ; 26.138,44.566 cw(c26.138,45.52) v2(25.463,44.845) 25.743,44.566 37.763,44.566 43.224,50.027 43.224,70.982 52.057,79.815 J6.2@52.057,82.412 ; J6.2@51.447,81.784 52.057,80.4 ; J6.2@51.691,81.867 52.057,80.4 ; J6.2@52.057,81.912 52.057,80.4 ; J6.2@52.423,81.867 52.057,80.4 ; J6.2@52.667,81.784 52.057,80.4
SCK: DL3.A J7.3 R25.1 U1.17 | length 118.1
  Top Layer w0.254: v2(31.78,33.136) 31.822,33.136 v2@31.864,33.178
  Top Layer w0.381: U1.17@30.848,35.791 31.679,35.791 ; U1.17@31.385,35.791 31.822,35.648 ; U1.17@31.385,35.791 31.679,35.791 ; U1.17@31.385,35.791 31.679,35.791 ; 31.679,35.791 31.822,35.648 ; 31.822,35.648 31.822,33.136 31.822,35.648 ; v2@31.646,33.271 ccw(c31.22,33.696) 31.822,33.696 cw(c31.22,33.696) v2@31.646,33.271
  Top Layer w0.635: 24.936,69.013 24.936,66.536 ; 24.936,69.077 24.936,66.536 ; DL3.A@26.697,64.775 24.936,66.536
  Bottom Layer w0.254: J7.3@1.883,59.464 3.548,58.683 ; J7.3@1.883,60.504 3.548,61.285 ; J7.3@2.008,59.688 3.548,58.683 ; J7.3@2.008,60.28 3.548,61.285 ; J7.3@2.543,59.744 3.548,61.285 ; J7.3@2.543,60.224 3.548,58.683 ; J7.3@2.767,59.619 3.548,61.285 ; J7.3@2.767,60.349 3.548,58.683 ; DL3.A@26.697,64.775 24.68,62.758 12.013,62.758 10.636,61.381 3.645,61.381 J7.3@2.248,59.984 3.645,58.587 3.645,55.467 3.219,55.042 3.219,46.794 3.778,46.235 3.778,42.229 5.886,40.121 7.029,40.121 8.553,38.597 8.553,31.612 11.322,28.843 31.184,28.843 31.78,29.439 v2(31.78,33.136) ; v2@31.601,32.956 cw(c31.167,32.523) 31.78,32.523 cw(c32.394,32.523) v2@31.96,32.956
ST_CP: U1.1 U3.12 | length 32.8
  Top Layer w0.381: v2@19.729,41.708 cw(c19.729,41.249) 20.054,41.574 cw(c20.379,41.899) v2@19.919,41.899 ; v2(19.729,41.899) 20.237,41.391 ; U1.1@21.294,41.391 20.237,41.391 ; U1.1@21.831,41.391 20.237,41.391
  Top Layer w0.508: U3.12@10.833,56.936 12.82,56.936 U3.12@11.544,56.936 ; 12.442,56.936 cw(c12.442,56.456) 12.781,56.795 ccw(c12.442,56.456) 12.442,56.936
  Bottom Layer w0.254: v2@12.617,56.885 cw(c12.004,56.885) 12.437,56.451 cw(c12.871,56.018) v2@12.871,56.631 ; v2(12.871,56.885) 10.274,54.288 10.274,50.592 12.475,48.391 14.617,48.391 16.266,46.742 18.823,46.742 19.729,45.836 v2(19.729,41.899) ; v2@19.549,42.079 ccw(c19.116,42.512) 19.729,42.512 ccw(c20.342,42.512) v2@19.909,42.079
SW1_IN: DL3.K J3.2 | length 59.1
  Bottom Layer w0.254: DL3.K@23.282,64.907 23.903,66.299 ; DL3.K@23.525,64.823 23.903,66.299 ; DL3.K@23.903,64.775 23.903,68.078 21.507,70.474 13.633,70.474 11.544,72.563 ; DL3.K@24.281,64.823 23.903,66.299 ; DL3.K@24.524,64.907 23.903,66.299 ; 11.544,72.563 11.544,82.666 11.544,82.437 11.544,72.563 ; 11.544,80.405 12.217,81.774 11.544,80.404 ; 11.544,80.405 10.975,81.821 11.544,80.404 ; 11.544,80.405 11.977,81.868 11.544,80.404 ; 11.544,80.405 11.221,81.896 11.544,80.404 ; 11.544,80.405 11.601,81.929 11.544,80.404
SW2_IN: DL4.K J2.2 | length 40.6
  Bottom Layer w0.254: J2.2@2.922,81.797 3.543,80.405 ; J2.2@3.165,81.882 3.543,80.405 ; J2.2@3.543,81.929 3.543,80.405 ; J2.2@3.543,82.666 3.543,76.754 11.601,68.696 11.601,66.045 12.871,64.775 DL4.K@16.503,64.775 14.979,64.775 ; J2.2@3.921,81.882 3.543,80.405 ; J2.2@4.164,81.797 3.543,80.405 ; DL4.K@16.371,64.154 14.979,64.775 ; DL4.K@16.371,65.396 14.979,64.775 ; DL4.K@16.455,64.397 14.979,64.775 ; DL4.K@16.455,65.153 14.979,64.775
TX: J6.3 R5.1 U1.31 | length 86.6
  Top Layer w0.254: U1.31@24.309,43.069 U1.31@24.428,43.188 ; 42.843,77.205 43.224,77.205 42.843,77.205
  Top Layer w0.508: U1.31@24.309,43.069 24.309,45.463 v2(24.428,45.582) ; U1.31@24.309,43.606 v2@24.309,45.38 ; 43.287,76.722 45.471,76.621 ; 43.303,76.342 45.471,76.621 ; 43.338,77.1 45.471,76.621 ; 43.808,76.621 46.366,76.621 49.517,79.771 J6.3@49.517,82.412 ; 24.309,44.987 cw(c25.023,44.987) 24.518,45.492 ccw(c25.023,44.987) 24.309,44.987
  Bottom Layer w0.254: v2@24.453,45.607 26.373,45.607 26.779,45.201 37.509,45.201 42.64,50.332 42.64,65.248 42.614,65.274 42.614,71.388 49.517,78.291 J6.3@49.517,82.412 ; v2@24.608,45.402 cw(c25.103,44.907) 25.103,45.607 ; v2@24.608,45.762 ccw(c24.98,46.134) 24.98,45.607 ; J6.3@48.907,81.784 49.517,80.4 ; J6.3@49.151,81.867 49.517,80.4 ; J6.3@49.517,81.912 49.517,80.4 ; J6.3@49.883,81.867 49.517,80.4 ; J6.3@50.127,81.784 49.517,80.4
VCC: C5.2 C7.2 C16.2 D7.2 FU2.2 Q1.2 Q2.2 Q3.2 Q7.2 R5.2 R6.2 R8.1 R9.2 R10.2 R13.2 U1.4 U1.6 U3.10 U3.16 | length 291.2
  Top Layer w0.381: 13.398,41.188 14.827,40.197 ; 13.633,41.391 14.827,40.197 ; 13.696,41.518 14.827,40.197 ; 14.068,41.761 14.827,40.197 ; 19.856,37.835 19.856,38.851 19.996,38.991 ; U1.6@21.294,37.391 20.191,37.391 ; U1.4@21.294,38.991 19.996,38.991 ; U1.6@21.831,37.391 20.191,37.391 ; U1.4@21.831,38.991 19.996,38.991 ; 14.827,40.197 17.384,40.197 20.191,37.391
  Top Layer w0.508: v1@2.203,47.233 3.854,47.233 ; v1(2.203,47.487) 3.854,47.233 ; 10.454,63.876 C16.2@9.442,64.251 ; 10.454,64.626 C16.2@9.442,64.251 ; 10.521,64.251 C16.2@9.442,64.251 ; 10.529,47.707 10.909,45.582 11.289,47.707 ; 10.53,47.779 10.909,49.671 ; 10.585,64.251 C16.2@9.442,64.251 ; U3.10@10.833,59.476 9.639,59.476 ; 10.909,50.018 U3.16@10.833,51.856 10.909,51.78 10.909,49.671 ; 11.288,47.779 10.909,49.671 ; v2(11.474,38.47) 11.474,39.175 10.909,39.74 10.909,44.566 ; C5.2@13.188,41.518 13.381,43.69 ; C5.2@13.253,41.552 13.633,43.677 14.013,41.552 ; C7.2@13.253,44.405 13.633,42.28 ; 13.321,41.584 13.885,43.69 ; 13.536,44.059 11.41,44.439 ; 13.536,44.818 11.41,44.439 ; 13.569,41.518 13.381,43.69 ; 13.569,44.439 11.41,44.439 ; 13.633,41.391 13.633,41.518 ; 13.696,41.518 13.885,43.69 ; 13.945,41.584 13.381,43.69 ; 14.013,44.405 13.633,42.28 ; 14.077,41.518 13.885,43.69 ; v2(26.993,30.113) v2@27.095,30.215 ; v2@27.057,30.003 cw(c27.423,29.37) R13.2@27.612,30.077 ; v2@27.103,30.05 cw(c27.581,29.774) R13.2@27.439,30.307 ; 28.506,29.837 v2@27.095,30.215 ; 28.506,30.593 v2@27.095,30.215 ; 28.555,30.215 v2@27.095,30.215 ; 28.619,30.215 v2@27.095,30.215 ; 36.665,62.975 36.665,68.188 38.062,69.585 39.668,69.585 40.938,70.855 40.938,74.157 ; R5.2@40.494,76.733 40.627,74.572 ; R6.2@40.558,74.123 40.938,71.998 ; R6.2@40.558,74.191 40.938,76.316 41.318,74.191 ; R5.2@40.558,76.689 40.938,74.563 ; 40.628,76.646 41.249,74.572 ; 40.874,76.722 40.627,74.572 ; 41.001,76.722 41.249,74.572 ; 41.248,76.646 40.627,74.572 ; 41.318,74.123 40.938,71.998 ; 41.318,76.689 40.938,74.563 ; 41.382,76.733 41.249,74.572 ; 3.854,47.233 6.292,49.671 10.909,49.671 ; 9.131,59.984 9.639,59.476 ; 9.131,59.984 9.131,63.94 C16.2@9.442,64.251 ; 9.131,59.984 U3.10@10.122,59.476 ; 9.639,59.476 U3.10@10.122,59.476 ; 9.639,59.476 U3.10@10.122,59.476 ; 10.909,44.566 11.036,44.439 13.633,44.439 13.633,41.518 ; 10.909,44.566 10.909,47.741 10.909,49.671 ; 13.633,41.518 13.633,42.28 ; 13.633,41.518 13.633,42.28 ; 13.633,42.28 13.264,41.613 13.633,42.28 ; 13.633,42.28 14.002,41.613 13.633,42.28 ; 40.938,71.998 40.938,74.157 ; 40.938,74.157 40.938,76.722 40.938,74.563 ; v2@27.083,30.024 cw(c27.545,29.561) 27.545,30.215 ccw(c27.545,29.561) v2@27.083,30.024
  Top Layer w0.635: v1(9.696,67.172) 11.068,67.172 ; 10.648,64.251 11.163,62.854 ; 12.744,69.839 FU2.2@15.284,69.839 11.288,69.839 D7.2@11.22,69.771 11.22,67.324 11.068,67.172 ; Q3.2@22.904,61.833 22.904,62.727 22.777,62.854 ; Q2.2@27.73,61.833 27.73,62.854 ; 30.333,74.411 31.159,72.76 ; Q7.2@33.064,61.833 33.064,62.727 33.191,62.854 ; Q1.2@38.302,61.706 37.504,62.854 ; Q1.2@38.652,61.706 37.504,62.854 ; 40.874,74.157 39.414,74.284 ; 40.938,74.157 40.811,74.284 39.414,74.284 ; 10.585,63.432 10.585,64.251 ; 10.585,63.432 11.163,62.854 ; 10.585,63.432 10.585,64.251 ; 10.585,63.432 10.585,64.251 ; 10.585,64.251 10.585,66.689 11.068,67.172 ; 11.163,62.854 22.777,62.854 ; 22.777,62.854 27.73,62.854 ; 27.73,62.854 33.191,62.854 ; 30.27,73.649 30.27,74.411 ; 30.27,73.649 31.159,72.76 ; 30.27,73.649 30.27,74.411 ; 30.27,73.649 30.27,74.411 ; 30.27,74.411 30.27,76.951 30.27,74.411 ; 31.159,72.76 37.89,72.76 39.414,74.284 ; 33.191,62.854 37.504,62.854
  Bottom Layer w0.254: v2@11.294,38.29 cw(c10.63,37.626) 11.569,37.626 ; v2(11.474,38.47) 11.569,38.375 11.569,32.882 14.338,30.113 v2(26.993,30.113) 27.07,30.19 v2@27.07,30.367 ; 11.569,38.087 cw(c11.857,38.087) v2@11.654,38.29 ; v2@26.814,29.934 ccw(c26.38,29.5) 26.38,30.113 ccw(c26.38,30.727) v2@26.814,30.293
  Bottom Layer w0.508: v1@2.139,47.423 0.806,48.757 ; v1(2.203,47.487) 0.806,48.757 ; 7.815,65.799 v1(9.696,67.172) 9.188,67.172 6.851,64.835 1.644,64.835 0.806,63.997 0.806,48.757
pads on no net: U3.9

## Polygon pours and split planes (outlines as drawn)
GND1 on Top Layer "TopLayer-No Net" (solid, remove dead copper, pour order 43): 57.888,50.789 40.997,50.789 40.997,5.069 40.997,4.942 58.567,4.942 58.567,50.789 58.567,50.662 42.138,50.662
GND on Top Layer "TopLayer-No Net" (solid, remove dead copper, pour order 41): 0,88 0,52.186 58,52.186 58,88 -0.013,88
GND on Top Layer "TopLayer-No Net" (solid, remove dead copper, pour order 61): 36.595,34.152 41.598,34.152 41.598,29.555 36.595,29.555 36.595,34.152
GND on Top Layer "TopLayer-No Net" (solid, remove dead copper, pour order 57): 39.323,64.126 41.827,64.126 41.827,29.555 39.354,29.555 39.354,64.102
GND1 on Top Layer "TopLayer-No Net" (solid, remove dead copper, pour order 56): 0.375,19.674 0.398,19.699 2.464,19.699 2.464,12.836 2.482,12.816 0.375,12.816 0.375,19.674
GND1 on Top Layer "TopLayer-No Net" (solid, remove dead copper, pour order 85): 2.188,11.038 2.457,11.247 2.457,12.816 0.171,12.816 0.171,11.352 0.574,11.038 2.188,11.038
GND1 on Top Layer "TopLayer-No Net" (solid, remove dead copper, pour order 75): 0.223,41.061 10.814,41.061 10.814,19.674 0.223,19.674 0.223,41.061
GND1 on Top Layer "TopLayer-No Net" (solid, remove dead copper, pour order 69): 44.494,12.308 47.923,12.308 47.923,5.45 44.612,5.45 44.494,5.679 44.494,12.308
+24V on Top Layer "TopLayer-No Net" (solid, remove dead copper, pour order 67): 0.425,3.291 51.352,3.291 51.352,-0.138 0.575,-0.138 0.425,-0.037 0.425,3.291
OUT1 on Top Layer "TopLayer-No Net" (solid, remove dead copper, pour order 64): 32.048,12.244 34.969,12.244 34.969,4.815 32.048,4.815
OUT2 on Top Layer "TopLayer-No Net" (solid, remove dead copper, pour order 60): 19.348,12.181 22.523,12.181 22.523,4.815 19.348,4.815 19.348,12.181
OUT3 on Top Layer "TopLayer-No Net" (solid, remove dead copper, pour order 55): 6.394,15.737 9.823,15.737 9.823,4.815 6.394,4.815 6.394,15.737
GND on Top Layer "TopLayer-No Net" (solid, remove dead copper, pour order 54): 44.748,59.933 48.426,59.933 48.426,55.361 44.748,55.361 44.748,59.933
OUT3 on Top Layer "TopLayer-No Net" (solid, remove dead copper, pour order 74): 2.965,19.014 10.712,19.014 10.712,12.435 2.965,12.435 2.965,19.014
OUT2 on Top Layer "TopLayer-No Net" (solid, remove dead copper, pour order 76): 17.062,18.988 24.555,18.988 24.555,12.181 17.062,12.181 17.062,18.988
OUT1 on Top Layer "TopLayer-No Net" (solid, remove dead copper, pour order 78): 31.286,18.912 38.144,18.912 38.144,12.181 31.286,12.181 31.286,18.912
GND1 on Top Layer "TopLayer-No Net" (solid, remove dead copper, pour order 80): 7.664,23.23 49.955,23.23 49.955,19.674 8.21,19.674 7.664,20.08 7.664,23.23
GND1 on Top Layer "TopLayer-No Net" (solid, remove dead copper, pour order 82): 12.109,23.103 15.919,23.103 15.919,17.139 15.792,17.007 12.109,17.007 12.109,23.103
GND1 on Top Layer "TopLayer-No Net" (solid, remove dead copper, pour order 84): 26.333,22.849 30.143,22.849 30.143,17.134 30.016,17.007 26.333,17.007 26.333,22.849
GND1 on Top Layer "TopLayer-No Net" (solid, remove dead copper, pour order 87): 40.303,22.849 44.113,22.849 44.113,17.134 43.986,17.007 40.303,17.007 40.303,22.849
NetQ6_1 on Top Layer "TopLayer-No Net" (solid, remove dead copper, pour order 89): 12.833,15.077 12.096,14.32 12.096,12.049 12.833,11.292 15.043,11.292 15.779,12.049 15.779,14.32 15.043,15.077 12.833,15.077
NetQ5_1 on Top Layer "TopLayer-No Net" (solid, remove dead copper, pour order 91): 27.057,15.204 26.32,14.447 26.32,12.176 27.057,11.419 29.267,11.419 30.003,12.176 30.003,14.447 29.267,15.204 27.057,15.204
NetQ4_1 on Top Layer "TopLayer-No Net" (solid, remove dead copper, pour order 93): 41.154,15.204 40.417,14.447 40.417,12.176 41.154,11.419 43.364,11.419 44.1,12.176 44.1,14.447 43.364,15.204 41.154,15.204
+24V on Top Layer "TopLayer-No Net" (solid, remove dead copper, pour order 59): 49.363,9.26 48.685,8.625 48.685,-0.138 58.718,-0.138 58.718,9.133 58.582,9.26 49.363,9.26
GND on Top Layer "TopLayer-No Net" (solid, remove dead copper, pour order 52): 3.956,63.78 8.985,63.78 8.985,51.639 3.956,51.639 3.956,63.78
GND on Top Layer "TopLayer-No Net" (solid, remove dead copper, pour order 58): 14.649,46.166 18.738,46.166 18.738,40.967 18.708,40.908 14.649,40.908 14.649,46.166
GND1 on Bottom Layer "TopLayer-No Net" (solid, remove dead copper, pour order 39): 43.871,51.043 43.871,41.153 43.893,41.153 57.353,41.153 57.353,51.043 43.871,51.043
GND1 on Bottom Layer "TopLayer-No Net" (solid, remove dead copper, pour order 96): 44.494,11.165 47.759,11.165 47.855,10.97 47.855,6.297 47.375,5.323 45.454,5.323 44.974,5.323 44.494,6.297 44.494,11.165
OUT1 on Bottom Layer "TopLayer-No Net" (solid, remove dead copper, pour order 94): 31.921,18.785 31.286,18.15 31.286,10.022 31.921,9.387 31.921,5.196 31.921,4.942 32.175,4.688 32.302,4.561 34.715,4.561 34.842,4.561 35.096,4.815 35.096,11.673 35.985,12.562 37.89,12.562 38.017,12.562 38.398,12.943 38.525,13.07 38.525,18.277 38.017,18.785 31.921,18.785
OUT2 on Bottom Layer "TopLayer-No Net" (solid, remove dead copper, pour order 92): 17.443,18.912 16.808,18.277 16.808,18.15 16.808,11.8 19.094,9.514 19.094,9.387 19.094,4.942 19.475,4.561 19.856,4.561 22.142,4.561 22.523,4.942 22.523,5.069 22.523,11.546 22.65,11.673 24.301,13.324 24.301,13.451 24.301,18.15 23.666,18.785 23.666,18.912 17.443,18.912
OUT3 on Bottom Layer "TopLayer-No Net" (solid, remove dead copper, pour order 90): 2.965,18.785 2.965,12.435 6.394,9.006 6.394,5.069 6.775,4.688 9.315,4.688 9.696,4.688 9.95,4.942 9.95,8.244 9.95,12.181 10.077,12.308 10.458,12.308 10.712,12.562 10.966,12.816 10.966,18.785 2.965,18.785
+24V on Bottom Layer "TopLayer-No Net" (solid, remove dead copper, pour order 88): 0.425,3.545 58.083,3.545 58.083,-0.138 0.579,-0.138 0.425,-0.011 0.425,3.545
+24V on Bottom Layer "TopLayer-No Net" (solid, remove dead copper, pour order 86): 48.685,9.26 58.083,9.26 58.083,-0.138 48.685,-0.138 48.685,9.006
GND on Bottom Layer "TopLayer-No Net" (solid, remove dead copper, pour order 101): -1.329,89.213 60.682,89.213 60.682,52.206 -1.329,52.206 -1.329,89.213
GND1 on Bottom Layer "TopLayer-No Net" (solid, remove dead copper, pour order 102): -0.458,41.153 57.889,41.153 57.889,0 -0.458,0 -0.458,41.153
GND on Bottom Layer "TopLayer-No Net" (solid, remove dead copper, pour order 62): 4.118,57.657 7.148,57.657 7.148,45.357 7.157,45.331 4.109,45.331 4.109,57.631 4.118,57.657
GND on Bottom Layer "TopLayer-No Net" (solid, remove dead copper, pour order 65): 6.605,48.224 12.676,48.224 12.676,44.21 6.66,44.21 6.66,48.132 6.605,48.224
GND on Bottom Layer "TopLayer-No Net" (solid, remove dead copper, pour order 68): 11.727,46.116 18.103,46.116 18.103,44.236 11.727,44.236 11.727,46.116
GND on Bottom Layer "TopLayer-No Net" (solid, remove dead copper, pour order 70): 15.69,34.812 26.46,34.812 26.46,30.647 15.69,30.647 15.69,34.812
GND on Bottom Layer "TopLayer-No Net" (solid, remove dead copper, pour order 73): 15.767,46.395 19.881,46.395 19.881,32.933 15.767,32.933 15.767,46.395

## Keep-outs
Keep-Out Layer:
  lines w0.254: -0.013,0 -0.013,88 ; 0,-1.662 0,-1.154 ; 0,0 58,0 58,88 0,88 ; 1.524,-1.916 0,-1.408 ; 1.524,-0.9 0,-1.408 ; 26.136,-1.408 0,-1.408 ; 31.864,-1.408 58,-1.408 ; 56.476,-1.916 58,-1.408 ; 56.476,-0.9 58,-1.408 ; 58,-1.662 58,-1.154 ; 59.626,1.524 60.134,0 ; 59.626,86.476 60.134,88 ; 59.88,0 60.388,0 ; 59.88,88 60.388,88 ; 60.134,41.135 60.134,0 ; 60.134,46.865 60.134,88 ; 60.642,1.524 60.134,0 ; 60.642,86.476 60.134,88
  text "88 (mm)" at 60.9,41.389 h1.52 r90
  text "58 (mm)" at 26.39,-2.175 h1.52

## Silkscreen, mask and mechanical layers (free items; w line width, h text height)
Top Overlay:
  lines w0.254: 0.806,50.916 9.258,50.916 ; 0.806,53.202 9.258,53.202 ; 5.194,49.011 5.194,55.107 ; 0.806,48.884 0.806,55.107 9.258,55.107 9.258,48.884 0.806,48.884
  text "GND A2 A1 GND" at 19.856,85.587 h1.52
  text "5V SDA SCL GND" at 32.753,85.587 h1.52
  text "5V TX RX GND" at 46.723,85.587 h1.52
  text "SW1 GND" at 2.273,85.485 h1.52
  text "SW2 GND" at 10.274,85.485 h1.52
  text "MISO    5V" at 1.441,53.71 h1.52
  text "SCK   MOSI" at 1.695,51.551 h1.52
  text "RSET   GND" at 1.314,49.265 h1.52
  text "OUT--24V" at 0.806,23.611 h2.5 r270
  text "+24V" at 47.796,14.975 h2.5
  text "-  +" at 45.072,-0.138 h5
  text "-    +" at 6.394,-0.265 h3.81
  text "-    +" at 19.094,-0.265 h3.81
  text "-    +" at 31.794,-0.265 h3.81
Bottom Overlay:
  lines w0.254: 10.204,39.575 47.796,39.575 ; 12.363,53.09 45.51,53.09 ; 12.5,38.622 12.5,40.553 ; 23.5,38.622 23.5,40.578 ; 29,37.327 29,58.561 ; 34.5,38.559 34.5,40.502 ; 45.5,38.559 45.5,40.578
  text "2016-12-10  V2.6" at 38.271,20.055 h3.05
Top Solder:
  lines w2.794: 14.014,19.166 14.014,20.182 14.903,21.071 ; 14.903,21.325 45.223,21.325 ; 28.111,19.166 28.111,21.325 ; 42.335,19.166 42.335,21.325 ; 45.223,21.071 46.192,20.102 46.192,7.355

## Text inside footprints (layer, text, board x,y; h text height)
C6: Top Overlay "+" at 50.966,27.699 h2 r180
C15: Top Overlay "+" at 42.765,66.659 h1.5
Q4: Top Overlay "1" at 38.555,14.626 h1.1 r90; Top Overlay "3" at 38.555,18.076 h1.1 r90
Q5: Top Overlay "1" at 24.331,14.626 h1.1 r90; Top Overlay "3" at 24.331,18.076 h1.1 r90
Q6: Top Overlay "1" at 10.234,14.626 h1.1 r90; Top Overlay "3" at 10.234,18.076 h1.1 r90
U2: Top Overlay "5" at 50.062,43.603 h1.1 r90; Top Overlay "1" at 50.062,40.153 h1.1 r90